# Altium PCB PCB1.PcbDoc (part 4 of 4)
Units mil, origin at the board's own origin, x right, y up, seen from the top; angles counter-clockwise.
Board outline 6000 x 4000 mil, 2 copper layers (Top Layer, Bottom Layer); 7 components, 0 nets, 14 pads, 0 vias.
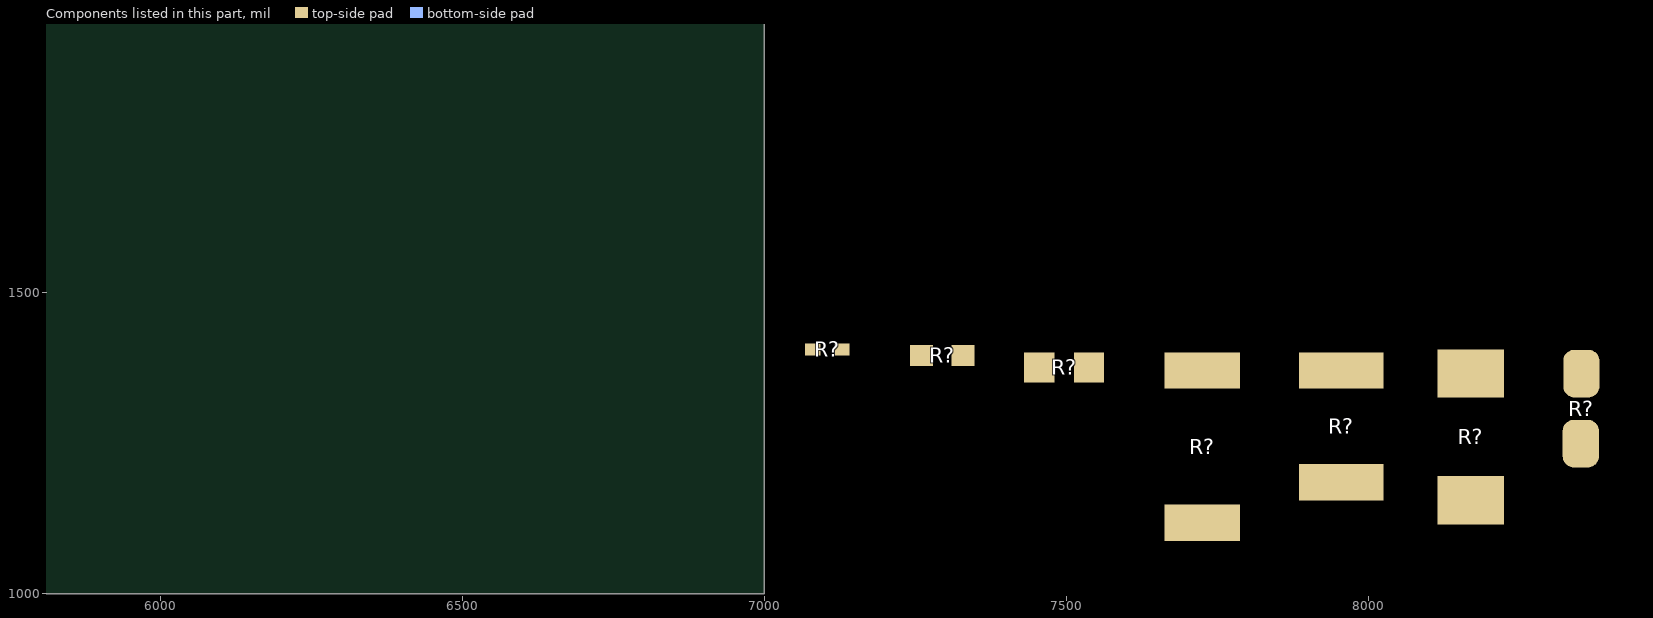
[diagram p4: the components of this part, seen from the top]

## Nets (pads, with @x,y where several pads share a name; then routed paths per layer and width w, separated by ;. In a path a pad name is that pad's centre, name@x,y a point inside that pad or via, vN(x,y) a via of type N, cw(c..) or ccw(c..) an arc to the next point about the centre after c; other vN are vias at no path point) (continued)
copper on no net: (continued)
  Top Layer w1: 6273,1561 6282,1561 ; 6273,1601 6275,1601 ; 6273,1602 6275,1602 ; 6273,1603 6275,1603 ; 6273,1704 6275,1704 ; 6273,1705 6275,1705 ; 6273,1706 6275,1706 ; 6273,1799 6276,1799 ; 6273,1806 6279,1806 ; 6274,1502 6280,1502 ; 6274,1509 6276,1509 ; 6274,1527 6280,1527 ; 6274,1539 6281,1539 ; 6274,1604 6275,1604 ; 6274,1605 6276,1605 ; 6274,1606 6276,1606 ; 6274,1607 6276,1607 ; 6274,1700 6276,1700 ; 6274,1701 6276,1701 ; 6274,1702 6276,1702 ; 6274,1703 6275,1703 ; 6274,1751 6283,1751 ; 6274,1798 6276,1798 ; 6274,1805 6280,1805 ; 6275,1503 6281,1503 ; 6275,1510 6277,1510 ; 6275,1511 6278,1511 ; 6275,1513 6279,1513 ; 6275,1526 6281,1526 ; 6275,1550 6282,1550 ; 6275,1608 6277,1608 ; 6275,1609 6277,1609 ; 6275,1610 6277,1610 ; 6275,1611 6277,1611 ; 6275,1696 6277,1696 ; 6275,1697 6277,1697 ; 6275,1698 6277,1698 ; 6275,1699 6277,1699 ; 6275,1773 6277,1773 ; 6275,1797 6277,1797 ; 6275,1804 6281,1804 ; 6276,1504 6281,1504 ; 6276,1512 6278,1512 ; 6276,1538 6283,1538 ; 6276,1560 6284,1560 ; 6276,1612 6277,1612 ; 6276,1613 6278,1613 ; 6276,1614 6278,1614 ; 6276,1615 6278,1615 ; 6276,1693 6278,1693 ; 6276,1694 6278,1694 ; 6276,1695 6278,1695 ; 6276,1747 6280,1747 ; 6276,1752 6290,1752 ; 6276,1795 6279,1795 ; 6276,1796 6278,1796 ; 6276,1803 6282,1803 ; 6277,1505 6282,1505 ; 6277,1506 6283,1506 ; 6277,1525 6283,1525 ; 6277,1549 6284,1549 ; 6277,1616 6279,1616 ; 6277,1617 6279,1617 ; 6277,1618 6279,1618 ; 6277,1619 6279,1619 ; 6277,1620 6279,1620 ; 6277,1621 6279,1621 ; 6277,1687 6279,1687 ; 6277,1688 6279,1688 ; 6277,1689 6279,1689 ; 6277,1690 6279,1690 ; 6277,1691 6279,1691 ; 6277,1692 6278,1692 ; 6277,1717 6292,1717 ; 6277,1718 6293,1718 ; 6277,1746 6281,1746 ; 6277,1753 6289,1753 ; 6277,1794 6280,1794 ; 6277,1802 6283,1802 ; 6278,1507 6284,1507 ; 6278,1515 6281,1515 ; 6278,1524 6288,1524 ; 6278,1537 6285,1537 ; 6278,1559 6286,1559 ; 6278,1622 6280,1622 ; 6278,1623 6280,1623 ; 6278,1624 6280,1624 ; 6278,1625 6280,1625 ; 6278,1626 6280,1626 ; 6278,1682 6280,1682 ; 6278,1683 6280,1683 ; 6278,1684 6280,1684 ; 6278,1685 6280,1685 ; 6278,1686 6279,1686 ; 6278,1715 6281,1715 ; 6278,1716 6284,1716 ; 6278,1744 6282,1744 ; 6278,1745 6282,1745 ; 6278,1793 6281,1793 ; 6278,1801 6283,1801 ; 6279,1508 6285,1508 ; 6279,1516 6282,1516 ; 6279,1548 6287,1548 ; 6279,1627 6280,1627 ; 6279,1628 6280,1628 ; 6279,1629 6281,1629 ; 6279,1630 6281,1630 ; 6279,1631 6281,1631 ; 6279,1632 6281,1632 ; 6279,1633 6281,1633 ; 6279,1634 6281,1634 ; 6279,1673 6281,1673 ; 6279,1674 6281,1674 ; 6279,1675 6281,1675 ; 6279,1676 6281,1676 ; 6279,1677 6281,1677 ; 6279,1678 6281,1678 ; 6279,1679 6281,1679 ; 6279,1680 6280,1680 ; 6279,1681 6280,1681 ; 6279,1719 6294,1719 ; 6279,1742 6283,1742 ; 6279,1743 6283,1743 ; 6279,1792 6281,1792 ; 6279,1799 6285,1799 ; 6279,1800 6284,1800 ; 6280,1509 6286,1509 ; 6280,1517 6282,1517 ; 6280,1523 6287,1523 ; 6280,1536 6286,1536 ; 6280,1635 6281,1635 ; 6280,1636 6282,1636 ; 6280,1637 6282,1637 ; 6280,1638 6282,1638 ; 6280,1639 6282,1639 ; 6280,1640 6282,1640 ; 6280,1641 6282,1641 ; 6280,1642 6282,1642 ; 6280,1643 6282,1643 ; 6280,1644 6282,1644 ; 6280,1645 6282,1645 ; 6280,1646 6282,1646 ; 6280,1647 6282,1647 ; 6280,1648 6282,1648 ; 6280,1659 6282,1659 ; 6280,1660 6282,1660 ; 6280,1661 6282,1661 ; 6280,1662 6282,1662 ; 6280,1663 6282,1663 ; 6280,1664 6282,1664 ; 6280,1665 6282,1665 ; 6280,1666 6282,1666 ; 6280,1667 6282,1667 ; 6280,1668 6282,1668 ; 6280,1669 6282,1669 ; 6280,1670 6282,1670 ; 6280,1671 6282,1671 ; 6280,1672 6281,1672 ; 6280,1741 6284,1741 ; 6280,1754 6289,1754 ; 6280,1790 6283,1790 ; 6280,1791 6282,1791 ; 6280,1798 6286,1798 ; 6281,1510 6286,1510 ; 6281,1511 6287,1511 ; 6281,1518 6283,1518 ; 6281,1535 6288,1535 ; 6281,1547 6288,1547 ; 6281,1558 6289,1558 ; 6281,1601 6303,1601 ; 6281,1602 6307,1602 ; 6281,1603 6288,1603 ; 6281,1649 6282,1649 ; 6281,1650 6282,1650 ; 6281,1651 6282,1651 ; 6281,1652 6282,1652 ; 6281,1653 6282,1653 ; 6281,1654 6282,1654 ; 6281,1655 6282,1655 ; 6281,1656 6282,1656 ; 6281,1657 6282,1657 ; 6281,1658 6282,1658 ; 6281,1738 6285,1738 ; 6281,1739 6285,1739 ; 6281,1740 6284,1740 ; 6281,1755 6288,1755 ; 6281,1789 6284,1789 ; 6281,1797 6287,1797 ; 6282,1512 6288,1512 ; 6282,1519 6284,1519 ; 6282,1520 6285,1520 ; 6282,1522 6286,1522 ; 6282,1604 6285,1604 ; 6282,1701 6287,1701 ; 6282,1702 6288,1702 ; 6282,1737 6285,1737 ; 6282,1788 6284,1788 ; 6282,1795 6288,1795 ; 6282,1796 6287,1796 ; 6283,1513 6289,1513 ; 6283,1521 6285,1521 ; 6283,1534 6289,1534 ; 6283,1546 6291,1546 ; 6283,1557 6292,1557 ; 6283,1698 6285,1698 ; 6283,1699 6286,1699 ; 6283,1700 6286,1700 ; 6283,1703 6289,1703 ; 6283,1720 6296,1720 ; 6283,1736 6284,1736 ; 6283,1786 6286,1786 ; 6283,1787 6285,1787 ; 6283,1794 6289,1794 ; 6284,1514 6289,1514 ; 6284,1515 6290,1515 ; 6284,1600 6300,1600 ; 6284,1704 6290,1704 ; 6284,1756 6288,1756 ; 6284,1785 6286,1785 ; 6284,1793 6290,1793 ; 6285,1516 6291,1516 ; 6285,1533 6293,1533 ; 6285,1545 6292,1545 ; 6285,1705 6290,1705 ; 6285,1706 6291,1706 ; 6285,1757 6287,1757 ; 6285,1784 6287,1784 ; 6285,1792 6290,1792 ; 6286,1517 6291,1517 ; 6286,1525 6288,1525 ; 6286,1556 6294,1556 ; 6286,1677 6290,1677 ; 6286,1678 6290,1678 ; 6286,1679 6289,1679 ; 6286,1680 6290,1680 ; 6286,1681 6290,1681 ; 6286,1682 6290,1682 ; 6286,1683 6291,1683 ; 6286,1707 6291,1707 ; 6286,1721 6303,1721 ; 6286,1751 6290,1751 ; 6286,1782 6289,1782 ; 6286,1783 6288,1783 ; 6286,1790 6292,1790 ; 6286,1791 6291,1791 ; 6287,1518 6292,1518 ; 6287,1526 6289,1526 ; 6287,1527 6290,1527 ; 6287,1532 6293,1532 ; 6287,1544 6295,1544 ; 6287,1630 6312,1630 ; 6287,1631 6313,1631 ; 6287,1632 6304,1632 ; 6287,1633 6296,1633 ; 6287,1674 6292,1674 ; 6287,1675 6291,1675 ; 6287,1676 6290,1676 ; 6287,1684 6292,1684 ; 6287,1685 6294,1685 ; 6287,1708 6298,1708 ; 6287,1749 6291,1749 ; 6287,1750 6291,1750 ; 6287,1781 6289,1781 ; 6287,1789 6293,1789 ; 6288,1519 6293,1519 ; 6288,1520 6294,1520 ; 6288,1528 6290,1528 ; 6288,1555 6296,1555 ; 6288,1599 6297,1599 ; 6288,1653 6314,1653 ; 6288,1654 6314,1654 ; 6288,1655 6314,1655 ; 6288,1672 6301,1672 ; 6288,1673 6293,1673 ; 6288,1686 6294,1686 ; 6288,1709 6296,1709 ; 6288,1747 6292,1747 ; 6288,1748 6292,1748 ; 6288,1779 6291,1779 ; 6288,1780 6290,1780 ; 6288,1787 6294,1787 ; 6288,1788 6293,1788 ; 6289,1521 6294,1521 ; 6289,1529 6291,1529 ; 6289,1530 6292,1530 ; 6289,1531 6292,1531 ; 6289,1652 6292,1652 ; 6289,1656 6314,1656 ; 6289,1671 6300,1671 ; 6289,1687 6294,1687 ; 6289,1710 6295,1710 ; 6289,1711 6294,1711 ; 6289,1716 6293,1716 ; 6289,1722 6302,1722 ; 6289,1745 6293,1745 ; 6289,1746 6293,1746 ; 6289,1778 6291,1778 ; 6289,1786 6295,1786 ; 6290,1522 6295,1522 ; 6290,1523 6296,1523 ; 6290,1543 6299,1543 ; 6290,1598 6297,1598 ; 6290,1670 6299,1670 ; 6290,1688 6293,1688 ; 6290,1712 6294,1712 ; 6290,1713 6294,1713 ; 6290,1714 6293,1714 ; 6290,1715 6293,1715 ; 6290,1743 6294,1743 ; 6290,1744 6294,1744 ; 6290,1776 6293,1776 ; 6290,1777 6292,1777 ; 6290,1784 6296,1784 ; 6290,1785 6295,1785 ; 6291,1524 6296,1524 ; 6291,1542 6299,1542 ; 6291,1554 6298,1554 ; 6291,1741 6295,1741 ; 6291,1742 6295,1742 ; 6291,1775 6293,1775 ; 6291,1783 6297,1783 ; 6292,1525 6297,1525 ; 6292,1526 6298,1526 ; 6292,1534 6294,1534 ; 6292,1553 6301,1553 ; 6292,1597 6297,1597 ; 6292,1669 6297,1669 ; 6292,1723 6302,1723 ; 6292,1740 6294,1740 ; 6292,1773 6295,1773 ; 6292,1774 6294,1774 ; 6292,1782 6297,1782 ; 6293,1527 6298,1527 ; 6293,1535 6295,1535 ; 6293,1536 6295,1536 ; 6293,1595 6299,1595 ; 6293,1596 6298,1596 ; 6293,1707 6305,1707 ; 6293,1771 6296,1771 ; 6293,1772 6295,1772 ; 6293,1780 6298,1780 ; 6293,1781 6298,1781 ; 6294,1528 6299,1528 ; 6294,1529 6300,1529 ; 6294,1537 6296,1537 ; 6294,1541 6298,1541 ; 6294,1629 6312,1629 ; 6294,1706 6304,1706 ; 6294,1770 6296,1770 ; 6294,1779 6299,1779 ; 6295,1530 6300,1530 ; 6295,1531 6301,1531 ; 6295,1538 6297,1538 ; 6295,1539 6297,1539 ; 6295,1540 6298,1540 ; 6295,1552 6304,1552 ; 6295,1593 6301,1593 ; 6295,1594 6300,1594 ; 6295,1673 6301,1673 ; 6295,1705 6303,1705 ; 6295,1768 6298,1768 ; 6295,1769 6297,1769 ; 6295,1777 6300,1777 ; 6295,1778 6300,1778 ; 6296,1532 6302,1532 ; 6296,1592 6302,1592 ; 6296,1603 6308,1603 ; 6296,1674 6301,1674 ; 6296,1724 6302,1724 ; 6296,1766 6299,1766 ; 6296,1767 6298,1767 ; 6296,1776 6301,1776 ; 6297,1533 6302,1533 ; 6297,1534 6303,1534 ; 6297,1591 6303,1591 ; 6297,1675 6302,1675 ; 6297,1676 6302,1676 ; 6297,1704 6301,1704 ; 6297,1765 6299,1765 ; 6297,1774 6302,1774 ; 6297,1775 6302,1775 ; 6298,1535 6303,1535 ; 6298,1544 6300,1544 ; 6298,1545 6301,1545 ; 6298,1551 6304,1551 ; 6298,1590 6304,1590 ; 6298,1677 6302,1677 ; 6298,1678 6302,1678 ; 6298,1679 6302,1679 ; 6298,1680 6302,1680 ; 6298,1681 6302,1681 ; 6298,1682 6303,1682 ; 6298,1763 6300,1763 ; 6298,1764 6300,1764 ; 6298,1772 6303,1772 ; 6298,1773 6303,1773 ; 6299,1536 6304,1536 ; 6299,1537 6304,1537 ; 6299,1546 6301,1546 ; 6299,1589 6304,1589 ; 6299,1604 6308,1604 ; 6299,1683 6303,1683 ; 6299,1684 6303,1684 ; 6299,1685 6304,1685 ; 6299,1686 6311,1686 ; 6299,1708 6305,1708 ; 6299,1720 6303,1720 ; 6299,1725 6302,1725 ; 6299,1761 6301,1761 ; 6299,1762 6301,1762 ; 6299,1770 6305,1770 ; 6299,1771 6304,1771 ; 6300,1538 6305,1538 ; 6300,1547 6302,1547 ; 6300,1548 6302,1548 ; 6300,1549 6303,1549 ; 6300,1550 6303,1550 ; 6300,1588 6304,1588 ; 6300,1687 6311,1687 ; 6300,1718 6304,1718 ; 6300,1719 6303,1719 ; 6300,1759 6302,1759 ; 6300,1760 6302,1760 ; 6300,1769 6305,1769 ; 6301,1539 6305,1539 ; 6301,1540 6306,1540 ; 6301,1587 6304,1587 ; 6301,1688 6310,1688 ; 6301,1709 6306,1709 ; 6301,1715 6305,1715 ; 6301,1716 6305,1716 ; 6301,1717 6304,1717 ; 6301,1757 6304,1757 ; 6301,1758 6303,1758 ; 6301,1767 6306,1767 ; 6301,1768 6306,1768 ; 6302,1541 6307,1541 ; 6302,1542 6307,1542 ; 6302,1553 6305,1553 ; 6302,1586 6303,1586 ; 6302,1689 6308,1689 ; 6302,1710 6306,1710 ; 6302,1711 6306,1711 ; 6302,1712 6305,1712 ; 6302,1713 6305,1713 ; 6302,1714 6305,1714 ; 6302,1755 6305,1755 ; 6302,1756 6304,1756 ; 6302,1765 6307,1765 ; 6302,1766 6307,1766 ; 6303,1543 6308,1543 ; 6303,1544 6308,1544 ; 6303,1554 6305,1554 ; 6303,1605 6309,1605 ; 6303,1628 6312,1628 ; 6303,1753 6305,1753 ; 6303,1754 6305,1754 ; 6303,1764 6308,1764 ; 6304,1545 6309,1545 ; 6304,1546 6309,1546 ; 6304,1555 6306,1555 ; 6304,1556 6306,1556 ; 6304,1751 6307,1751 ; 6304,1752 6306,1752 ; 6304,1761 6309,1761 ; 6304,1762 6309,1762 ; 6304,1763 6309,1763 ; 6305,1547 6310,1547 ; 6305,1557 6307,1557 ; 6305,1558 6307,1558 ; 6305,1749 6307,1749 ; 6305,1750 6307,1750 ; 6305,1760 6310,1760 ; 6306,1548 6310,1548 ; 6306,1549 6311,1549 ; 6306,1550 6311,1550 ; 6306,1559 6308,1559 ; 6306,1560 6308,1560 ; 6306,1606 6309,1606 ; 6306,1672 6310,1672 ; 6306,1673 6311,1673 ; 6306,1674 6311,1674 ; 6306,1675 6312,1675 ; 6306,1747 6308,1747 ; 6306,1748 6308,1748 ; 6306,1758 6311,1758 ; 6306,1759 6311,1759 ; 6307,1551 6312,1551 ; 6307,1561 6309,1561 ; 6307,1562 6309,1562 ; 6307,1563 6309,1563 ; 6307,1676 6312,1676 ; 6307,1685 6312,1685 ; 6307,1745 6309,1745 ; 6307,1746 6309,1746 ; 6307,1756 6312,1756 ; 6307,1757 6311,1757 ; 6308,1552 6312,1552 ; 6308,1553 6313,1553 ; 6308,1554 6313,1554 ; 6308,1564 6310,1564 ; 6308,1565 6310,1565 ; 6308,1620 6311,1620 ; 6308,1621 6312,1621 ; 6308,1622 6312,1622 ; 6308,1623 6312,1623 ; 6308,1624 6312,1624 ; 6308,1627 6312,1627 ; 6308,1677 6313,1677 ; 6308,1684 6312,1684 ; 6308,1743 6310,1743 ; 6308,1744 6310,1744 ; 6308,1754 6313,1754 ; 6308,1755 6313,1755 ; 6309,1555 6314,1555 ; 6309,1556 6314,1556 ; 6309,1566 6311,1566 ; 6309,1567 6311,1567 ; 6309,1568 6311,1568 ; 6309,1625 6312,1625 ; 6309,1626 6312,1626 ; 6309,1632 6313,1632 ; 6309,1633 6313,1633 ; 6309,1678 6313,1678 ; 6309,1679 6313,1679 ; 6309,1680 6313,1680 ; 6309,1681 6312,1681 ; 6309,1682 6312,1682 ; 6309,1683 6312,1683 ; 6309,1740 6311,1740 ; 6309,1741 6311,1741 ; 6309,1742 6311,1742 ; 6309,1752 6314,1752 ; 6309,1753 6314,1753 ; 6310,1557 6315,1557 ; 6310,1558 6315,1558 ; 6310,1569 6312,1569 ; 6310,1634 6313,1634 ; 6310,1635 6313,1635 ; 6310,1636 6313,1636 ; 6310,1637 6314,1637 ; 6310,1638 6314,1638 ; 6310,1738 6312,1738 ; 6310,1739 6312,1739 ; 6310,1750 6315,1750 ; 6310,1751 6314,1751 ; 6311,1559 6316,1559 ; 6311,1560 6316,1560 ; 6311,1570 6312,1570 ; 6311,1571 6313,1571 ; 6311,1572 6313,1572 ; 6311,1573 6314,1573 ; 6311,1639 6312,1639 ; 6311,1735 6313,1735 ; 6311,1736 6313,1736 ; 6311,1737 6313,1737 ; 6311,1747 6316,1747 ; 6311,1748 6316,1748 ; 6311,1749 6315,1749 ; 6312,1561 6316,1561 ; 6312,1562 6317,1562 ; 6312,1574 6314,1574 ; 6312,1575 6314,1575 ; 6312,1733 6314,1733 ; 6312,1734 6314,1734 ; 6312,1745 6317,1745 ; 6312,1746 6316,1746 ; 6313,1563 6317,1563 ; 6313,1564 6318,1564 ; 6313,1565 6318,1565 ; 6313,1576 6315,1576 ; 6313,1577 6315,1577 ; 6313,1578 6315,1578 ; 6313,1730 6315,1730 ; 6313,1731 6315,1731 ; 6313,1732 6314,1732 ; 6313,1743 6318,1743 ; 6313,1744 6318,1744 ; 6314,1566 6318,1566 ; 6314,1567 6319,1567 ; 6314,1579 6316,1579 ; 6314,1580 6316,1580 ; 6314,1727 6316,1727 ; 6314,1728 6316,1728 ; 6314,1729 6316,1729 ; 6314,1741 6318,1741 ; 6314,1742 6318,1742 ; 6315,1568 6319,1568 ; 6315,1569 6320,1569 ; 6315,1570 6320,1570 ; 6315,1581 6316,1581 ; 6315,1582 6317,1582 ; 6315,1583 6317,1583 ; 6315,1724 6317,1724 ; 6315,1725 6317,1725 ; 6315,1726 6316,1726 ; 6315,1738 6320,1738 ; 6315,1739 6319,1739 ; 6315,1740 6319,1740 ; 6316,1571 6320,1571 ; 6316,1572 6321,1572 ; 6316,1584 6318,1584 ; 6316,1585 6318,1585 ; 6316,1586 6318,1586 ; 6316,1587 6318,1587 ; 6316,1720 6318,1720 ; 6316,1721 6318,1721 ; 6316,1722 6318,1722 ; 6316,1723 6318,1723 ; 6316,1736 6321,1736 ; 6316,1737 6320,1737 ; 6317,1573 6321,1573 ; 6317,1574 6322,1574 ; 6317,1575 6322,1575 ; 6317,1588 6319,1588 ; 6317,1589 6319,1589 ; 6317,1590 6319,1590 ; 6317,1718 6319,1718 ; 6317,1719 6319,1719 ; 6317,1732 6322,1732 ; 6317,1733 6322,1733 ; 6317,1734 6321,1734 ; 6317,1735 6321,1735 ; 6318,1576 6322,1576 ; 6318,1577 6323,1577 ; 6318,1591 6320,1591 ; 6318,1592 6320,1592 ; 6318,1593 6320,1593 ; 6318,1594 6320,1594 ; 6318,1713 6320,1713 ; 6318,1714 6320,1714 ; 6318,1715 6320,1715 ; 6318,1716 6320,1716 ; 6318,1717 6319,1717 ; 6318,1730 6323,1730 ; 6318,1731 6322,1731 ; 6319,1578 6323,1578 ; 6319,1579 6323,1579 ; 6319,1580 6324,1580 ; 6319,1595 6321,1595 ; 6319,1596 6321,1596 ; 6319,1597 6321,1597 ; 6319,1710 6321,1710 ; 6319,1711 6321,1711 ; 6319,1712 6321,1712 ; 6319,1727 6324,1727 ; 6319,1728 6323,1728 ; 6319,1729 6323,1729 ; 6320,1581 6324,1581 ; 6320,1582 6324,1582 ; 6320,1583 6325,1583 ; 6320,1584 6325,1584 ; 6320,1598 6322,1598 ; 6320,1599 6322,1599 ; 6320,1600 6322,1600 ; 6320,1601 6322,1601 ; 6320,1602 6322,1602 ; 6320,1706 6322,1706 ; 6320,1707 6322,1707 ; 6320,1708 6322,1708 ; 6320,1709 6322,1709 ; 6320,1724 6325,1724 ; 6320,1725 6325,1725 ; 6320,1726 6324,1726 ; 6321,1585 6325,1585 ; 6321,1586 6325,1586 ; 6321,1603 6323,1603 ; 6321,1604 6323,1604 ; 6321,1605 6323,1605 ; 6321,1606 6323,1606 ; 6321,1702 6323,1702 ; 6321,1703 6323,1703 ; 6321,1704 6323,1704 ; 6321,1705 6323,1705 ; 6321,1721 6325,1721 ; 6321,1722 6325,1722 ; 6321,1723 6325,1723 ; 6322,1587 6326,1587 ; 6322,1588 6326,1588 ; 6322,1589 6326,1589 ; 6322,1590 6327,1590 ; 6322,1591 6327,1591 ; 6322,1607 6323,1607 ; 6322,1608 6324,1608 ; 6322,1609 6324,1609 ; 6322,1610 6324,1610 ; 6322,1611 6324,1611 ; 6322,1696 6324,1696 ; 6322,1697 6324,1697 ; 6322,1698 6324,1698 ; 6322,1699 6324,1699 ; 6322,1700 6324,1700 ; 6322,1701 6323,1701 ; 6322,1717 6327,1717 ; 6322,1718 6327,1718 ; 6322,1719 6326,1719 ; 6322,1720 6326,1720 ; 6323,1592 6327,1592 ; 6323,1593 6327,1593 ; 6323,1612 6325,1612 ; 6323,1613 6325,1613 ; 6323,1614 6325,1614 ; 6323,1615 6325,1615 ; 6323,1616 6325,1616 ; 6323,1691 6325,1691 ; 6323,1692 6325,1692 ; 6323,1693 6325,1693 ; 6323,1694 6325,1694 ; 6323,1695 6325,1695 ; 6323,1715 6327,1715 ; 6323,1716 6327,1716 ; 6324,1594 6328,1594 ; 6324,1595 6328,1595 ; 6324,1596 6328,1596 ; 6324,1597 6329,1597 ; 6324,1598 6329,1598 ; 6324,1617 6325,1617 ; 6324,1618 6325,1618 ; 6324,1619 6326,1619 ; 6324,1620 6326,1620 ; 6324,1621 6326,1621 ; 6324,1622 6326,1622 ; 6324,1623 6326,1623 ; 6324,1684 6326,1684 ; 6324,1685 6326,1685 ; 6324,1686 6326,1686 ; 6324,1687 6326,1687 ; 6324,1688 6326,1688 ; 6324,1689 6325,1689 ; 6324,1690 6325,1690 ; 6324,1709 6329,1709 ; 6324,1710 6329,1710 ; 6324,1711 6328,1711 ; 6324,1712 6328,1712 ; 6324,1713 6328,1713 ; 6324,1714 6328,1714 ; 6325,1599 6329,1599 ; 6325,1600 6329,1600 ; 6325,1601 6330,1601 ; 6325,1624 6326,1624 ; 6325,1625 6327,1625 ; 6325,1626 6327,1626 ; 6325,1627 6327,1627 ; 6325,1628 6327,1628 ; 6325,1629 6327,1629 ; 6325,1630 6327,1630 ; 6325,1631 6327,1631 ; 6325,1632 6327,1632 ; 6325,1633 6327,1633 ; 6325,1675 6327,1675 ; 6325,1676 6327,1676 ; 6325,1677 6327,1677 ; 6325,1678 6327,1678 ; 6325,1679 6327,1679 ; 6325,1680 6327,1680 ; 6325,1681 6327,1681 ; 6325,1682 6327,1682 ; 6325,1683 6327,1683 ; 6325,1706 6330,1706 ; 6325,1707 6329,1707 ; 6325,1708 6329,1708 ; 6326,1602 6330,1602 ; 6326,1603 6330,1603 ; 6326,1604 6330,1604 ; 6326,1605 6330,1605 ; 6326,1606 6331,1606 ; 6326,1634 6327,1634 ; 6326,1635 6327,1635 ; 6326,1636 6327,1636 ; 6326,1637 6328,1637 ; 6326,1638 6328,1638 ; 6326,1639 6328,1639 ; 6326,1640 6328,1640 ; 6326,1641 6328,1641 ; 6326,1642 6328,1642 ; 6326,1643 6328,1643 ; 6326,1644 6328,1644 ; 6326,1645 6328,1645 ; 6326,1646 6328,1646 ; 6326,1647 6328,1647 ; 6326,1660 6328,1660 ; 6326,1661 6328,1661 ; 6326,1662 6328,1662 ; 6326,1663 6328,1663 ; 6326,1664 6328,1664 ; 6326,1665 6328,1665 ; 6326,1666 6328,1666 ; 6326,1667 6328,1667 ; 6326,1668 6328,1668 ; 6326,1669 6328,1669 ; 6326,1670 6328,1670 ; 6326,1671 6328,1671 ; 6326,1672 6327,1672 ; 6326,1673 6327,1673 ; 6326,1674 6327,1674 ; 6326,1701 6331,1701 ; 6326,1702 6331,1702 ; 6326,1703 6330,1703 ; 6326,1704 6330,1704 ; 6326,1705 6330,1705 ; 6327,1607 6331,1607 ; 6327,1608 6331,1608 ; 6327,1609 6331,1609 ; 6327,1610 6331,1610 ; 6327,1611 6332,1611 ; 6327,1648 6328,1648 ; 6327,1649 6328,1649 ; 6327,1650 6328,1650 ; 6327,1651 6328,1651 ; 6327,1652 6328,1652 ; 6327,1653 6328,1653 ; 6327,1654 6328,1654 ; 6327,1655 6328,1655 ; 6327,1656 6328,1656 ; 6327,1657 6328,1657 ; 6327,1658 6328,1658 ; 6327,1659 6328,1659 ; 6327,1697 6332,1697 ; 6327,1698 6331,1698 ; 6327,1699 6331,1699 ; 6327,1700 6331,1700 ; 6328,1612 6332,1612 ; 6328,1613 6332,1613 ; 6328,1614 6332,1614 ; 6328,1615 6332,1615 ; 6328,1616 6332,1616 ; 6328,1617 6333,1617 ; 6328,1690 6333,1690 ; 6328,1691 6332,1691 ; 6328,1692 6332,1692 ; 6328,1693 6332,1693 ; 6328,1694 6332,1694 ; 6328,1695 6332,1695 ; 6328,1696 6332,1696 ; 6329,1618 6333,1618 ; 6329,1619 6333,1619 ; 6329,1620 6333,1620 ; 6329,1621 6333,1621 ; 6329,1622 6333,1622 ; 6329,1623 6334,1623 ; 6329,1624 6334,1624 ; 6329,1625 6334,1625 ; 6329,1683 6334,1683 ; 6329,1684 6334,1684 ; 6329,1685 6333,1685 ; 6329,1686 6333,1686 ; 6329,1687 6333,1687 ; 6329,1688 6333,1688 ; 6329,1689 6333,1689 ; 6330,1626 6334,1626 ; 6330,1627 6334,1627 ; 6330,1628 6334,1628 ; 6330,1629 6334,1629 ; 6330,1630 6334,1630 ; 6330,1631 6334,1631 ; 6330,1632 6334,1632 ; 6330,1675 6334,1675 ; 6330,1676 6334,1676 ; 6330,1677 6334,1677 ; 6330,1678 6334,1678 ; 6330,1679 6334,1679 ; 6330,1680 6334,1680 ; 6330,1681 6334,1681 ; 6330,1682 6334,1682 ; 6331,1633 6334,1633 ; 6331,1634 6335,1634 ; 6331,1635 6335,1635 ; 6331,1636 6335,1636 ; 6331,1637 6335,1637 ; 6331,1638 6335,1638 ; 6331,1639 6335,1639 ; 6331,1640 6335,1640 ; 6331,1641 6335,1641 ; 6331,1642 6335,1642 ; 6331,1643 6335,1643 ; 6331,1644 6335,1644 ; 6331,1645 6335,1645 ; 6331,1646 6335,1646 ; 6331,1647 6335,1647 ; 6331,1648 6335,1648 ; 6331,1649 6336,1649 ; 6331,1650 6336,1650 ; 6331,1651 6336,1651 ; 6331,1652 6336,1652 ; 6331,1653 6336,1653 ; 6331,1654 6336,1654 ; 6331,1655 6336,1655 ; 6331,1656 6336,1656 ; 6331,1657 6336,1657 ; 6331,1658 6335,1658 ; 6331,1659 6335,1659 ; 6331,1660 6335,1660 ; 6331,1661 6335,1661 ; 6331,1662 6335,1662 ; 6331,1663 6335,1663 ; 6331,1664 6335,1664 ; 6331,1665 6335,1665 ; 6331,1666 6335,1666 ; 6331,1667 6335,1667 ; 6331,1668 6335,1668 ; 6331,1669 6335,1669 ; 6331,1670 6335,1670 ; 6331,1671 6335,1671 ; 6331,1672 6335,1672 ; 6331,1673 6335,1673 ; 6331,1674 6334,1674